# Altium PCB Morpheus_pill.PcbDoc
Units mil, origin at the board's own origin, x right, y up, seen from the top; angles counter-clockwise.
Board outline 809.88 x 810.01 mil, 4 copper layers (TOP, VSS, SIG, BOT), stack 31.6 mil thick; 82 components, 62 nets, 246 pads, 116 vias.
Unrouted connection lines stored in the file: 3.
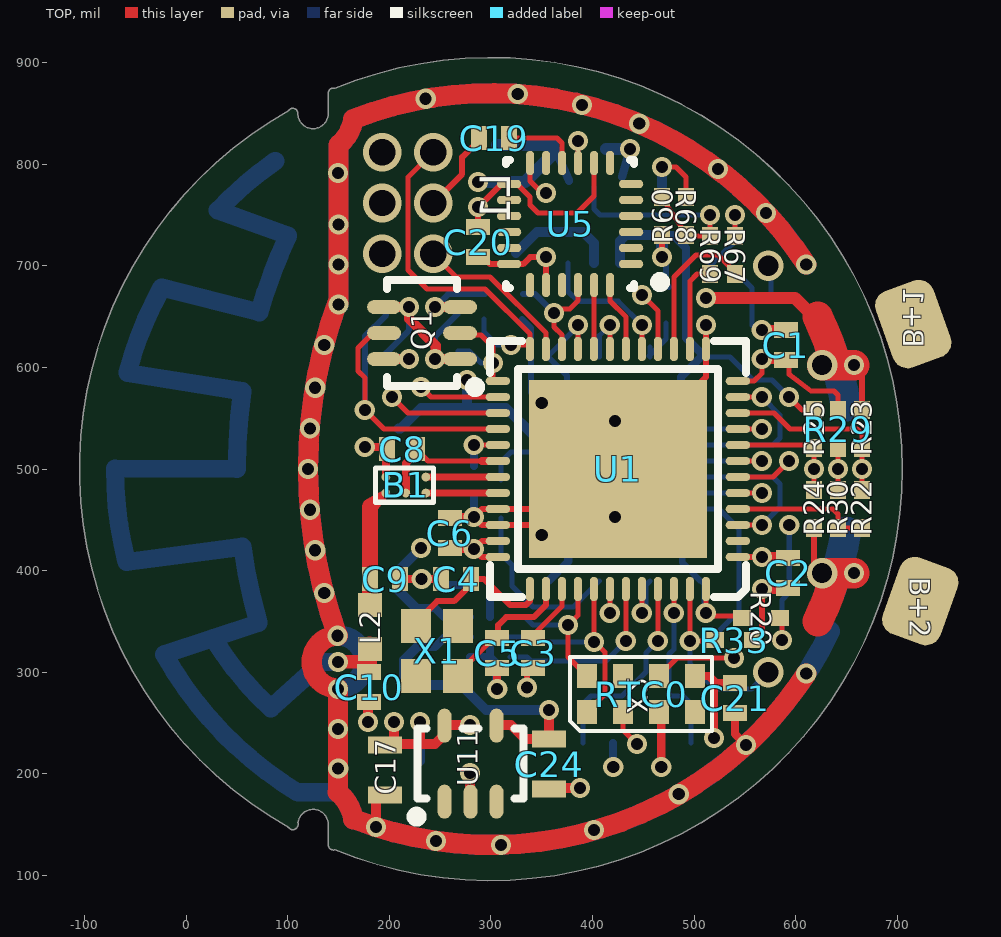
[diagram p0: TOP view]
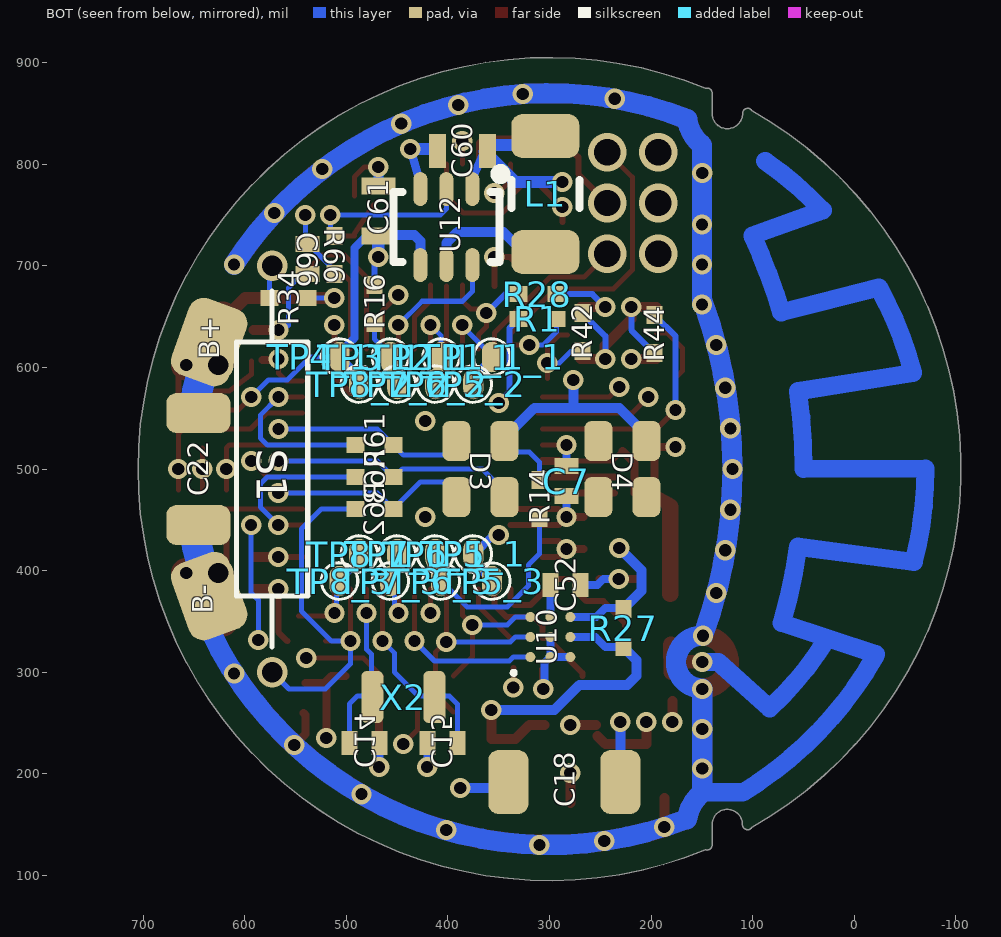
[diagram p1: BOT view, seen from below]
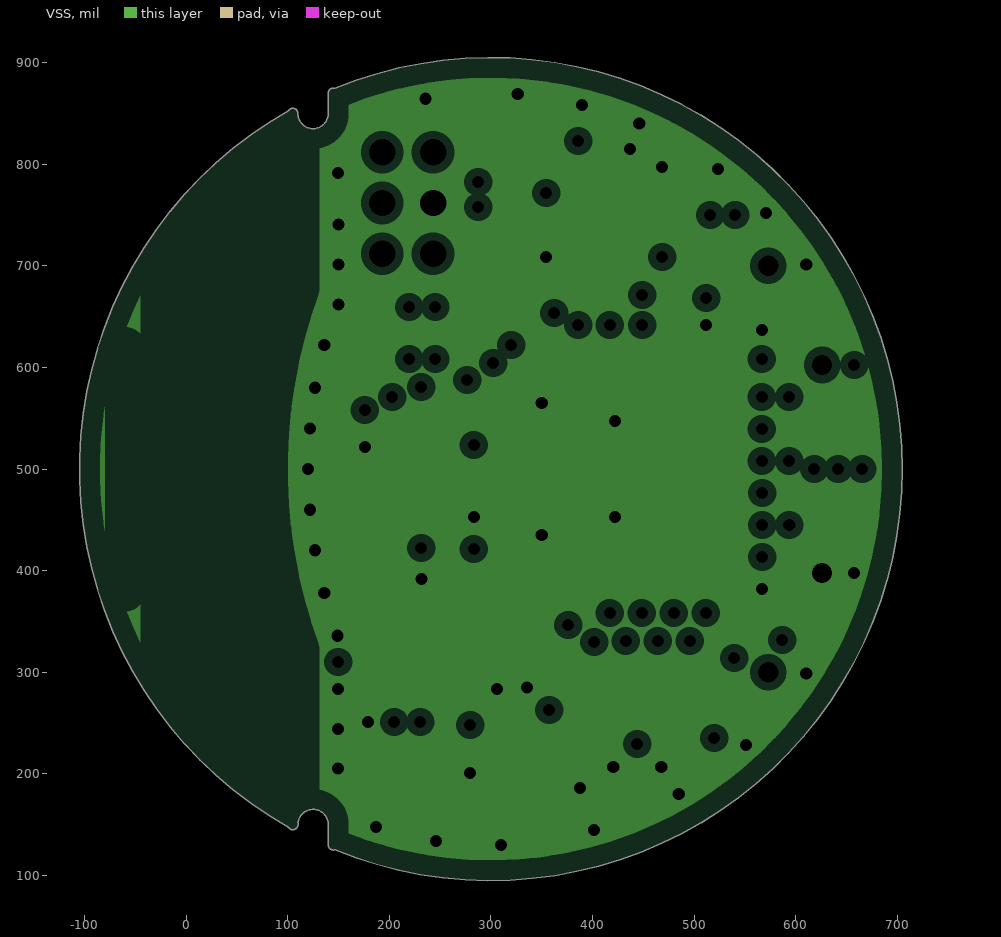
[diagram p2: VSS, clearances drawn from the general rule]
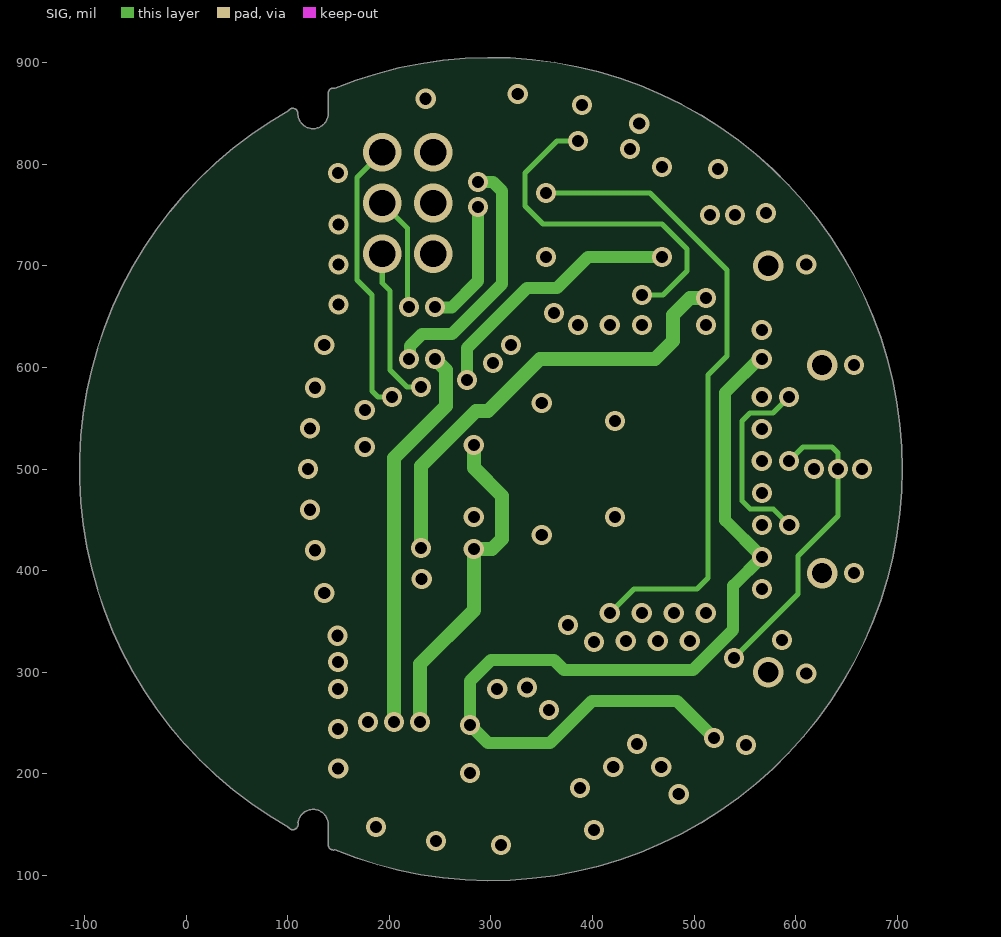
[diagram p3: SIG]

## Layer stack, top to bottom
TOP: signal copper 1.4
Dielectric: prepreg 6, FR-4, Dk 4.8
VSS: plane copper 1.4, net GND
Dielectric: core 14, FR-4, Dk 4.8
SIG: signal copper 1.4
Dielectric: prepreg 6, FR-4, Dk 4.8
BOT: signal copper 1.4

## Board outline
100.7,147.41 cw(c300,500) 100.7,852.59 cw(c105,850) 110.02,850 ccw(c125,850) 139.99,850 139.99,870 cw(c145,870) 146.48,874.79 cw(c300,500) 705.01,500 cw(c300,500) 146.48,125.21 cw(c145,130) 139.99,130 139.99,150 ccw(c125,150) 110.14,151.95 cw(c105.32,150.57) 110.33,150.57 cw(c105.32,150.57) 109.53,147.85 cw(c105,150)

## Design rules (kind name [scope] priority, off if disabled: settings)
Clearance "Top Polygon" [(InPolygon)] p1: gap=5
Clearance [All] p2: gap=3
ComponentClearance [All] p1: gap=5 collisioncheckmode=3 verticalgap=5 showdistances=FALSE
FabricationTestPointUsage TestPointUsage [All] p1: valid=0 allowmultiple=FALSE
FabricationTestpoint Testpoint [All] p1: side=3 testpointundercomponent=TRUE minsize=40 maxsize=100 preferedsize=60 minholesize=0 maxholesize=40 preferedholesize=32 testpointgrid=1 allowsidetop=TRUE allowsidebottom=TRUE usegrid=TRUE gridtolerance=0.01
HoleSize [All] p1: absolutevalues=TRUE maxlimit=250 minlimit=3 maxpercent=80.000 minpercent=20.000
MinimumAnnularRing [All] p1: minimumring=2
PasteMaskExpansion [All] p1: expansion=-1
PlaneClearance [All] p1: clearance=8
PlaneConnect [All] p1: planeconnectstyle=Direct reliefexpansion=25 reliefentries=4 reliefconductorwidth=20 reliefairgap=10
PolygonConnect [All] p1: connectstyle=Direct reliefconductorwidth=15 reliefentries=4 polygonreliefangle="45 Angle"
RoutingLayers [All] p1: top layer_v5=TRUE mid layer 2_v5=FALSE bottom layer_v5=TRUE
RoutingVias [All] p1: holewidth=12 width=22 viastyle="Through Hole" minholewidth=3 minwidth=8 maxholewidth=65 maxwidth=100
SilkscreenOverComponentPads [All] p1: minsilkscreentomaskgap=10
SolderMaskExpansion [All] p1: expansion=3
Width [All] p1: maxlimit=200 minlimit=3 preferedwidth=10 toplayer_maxwidth=100 midlayer2_maxwidth=100 minimp=50.000000 maximp=50.000000 favimp=50.000000
19 further rules are at their usual default settings.

## Classes and differential pairs
component class Morpheus_pill: C9 C10 R29 R30
component class Bluetooth: B1 C1 C2 C3 C4 C5 C6 C7 C8 C14 C15 R33 R34 RTC0 U1 X1 X2
component class Memory: R14 R16
component class Motion: C19 C20 R28 U5
component class Power: B+ B- C17 C18 C22 C24 C52 C60 C61 C66 D3 Q1 R42 R44 R60 R61 R62 R63 R66 R67 R68 R69 U10 U11 U12

## Components (designator, comment, footprint, x,y, rotation, side; value= is the part's Value field where it differs from the comment)
B1 "BAL-NRF02D3" BAL-ST-WLCSP 216.34,484.25 r180 top locked
B+ "5016" TP0875x050#1 722.44,626.97 r180 bottom
B+1 "5016" TP0875x050#2 803.15,644.68 r180 top (schematic designator B+)
B+2 "5016" TP0875x050#1 810.04,368.11 r180 top (schematic designator B+)
B- "5016" TP0875x050#3 647.64,382.87 r90 bottom
C1 "0.1u" CAP0402 590.35,622.05 r270 top
C2 "0.1u" CAP0402 592.52,397.64 r90 top
C3 "0.1u" CAP0402 341.54,318.9 r90 top
C4 "12p" CAP0402 265.75,391.73 r0 top
C5 "12p" CAP0402 306.14,318.9 r90 top
C6 "1000p" CAP0402 259.65,437.01 r270 top
C7 "0.047u" CAP0402 283.46,488.19 r90 bottom
C8 "2200p" CAP0402 212.6,519.68 r0 top
C9 "2.2 p" CAP0402 195.87,391.73 r0 top
C10 "1.0p" CAP0402 180.08,285.36 r270 top
C14 "12p" CAP0402 482.28,230.32 r0 bottom
C15 "12p" CAP0402 405.51,230.32 r180 bottom
C17 "4.7u" CAP0603 195.87,203.74 r90 top
C18 "100u" CAP1206 285.43,191.93 r180 bottom
C19 "0.1u" CAP0402 303.15,825.79 r0 top
C20 "0.1u" CAP0402 287.4,723.43 r90 top
C21 "0.1u" CAP0402 540.35,274.61 r90 top
C22 "100u" CAP1206 645.67,500 r270 bottom locked
C24 "4.7u" CAP0603 357.28,209.65 r90 top
C52 "0.47u" CAP0402 284.45,385.83 r180 bottom
C60 "4.7u" CAP0603 385.83,812.99 r180 bottom
C61 "4.7u" CAP0603 468.5,753.94 r270 bottom
C66 "1000p" CAP0402 538.39,706.69 r90 bottom
D3 "LTST-C19F" DFN165X210X160X80-4N 368,500 r180 bottom
D4 "LTST-C19F" DFN165X210X160X80-4N 228.35,500 r180 bottom (schematic designator D3)
L1 "2.2u" IND_1206 304.13,770.67 r270 bottom locked
L2 "2.2n" IND_0402 181.1,344.49 r270 top
Q1 "Si1965EH" SOT65P212X110-6N 232.28,633.86 r180 top locked
R1 "100k" RES0402 312.01,647.64 r0 bottom
R14 "100k" RES0402 310.04,470.47 r90 bottom
R16 "100k" RES0402 472.44,662.4 r90 bottom
R20 "100K" RES0402 565.94,353.35 r0 top
R22 "1.3M" RES0402 665.35,460.63 r90 top
R23 "1.3M" RES0402 665.35,539.37 r90 top
R24 "1.3M" RES0402 618.11,460.63 r90 top
R25 "1.3M" RES0402 618.11,539.37 r90 top
R27 "100" RES0402 227.36,343.5 r90 bottom
R28 "100k" RES0402 312.01,672.24 r180 bottom
R29 "1.3M" RES0402 641.73,539.37 r90 top
R30 "1.3M" RES0402 641.73,460.63 r90 top
R33 "1.3M" RES0402 539.37,331.69 r180 top
R34 "1.3M" RES0402 557.09,668.31 r180 bottom
R42 "1.3M" RES0402 267.72,634.84 r90 bottom
R44 "1.3M" RES0402 196.85,632.87 r270 bottom
R60 "1.3M" RES0402 468.5,749.02 r270 top
R61 "100" RES0402 472.44,523.62 r180 bottom
R62 "100" RES0402 472.44,460.63 r180 bottom
R63 "100" RES0402 472.44,492.13 r180 bottom
R66 "523k" RES0402 511.81,710.63 r90 bottom
R67 "100k" RES0402 540.35,710.63 r90 top
R68 "523k" RES0402 492.13,749.02 r270 top
R69 "523k" RES0402 515.75,710.63 r90 top
RTC0 "AB-RTCMC-32.768kHz-AIGZ" 8-CLCC 447.83,278.54 r0 top locked
S1 "REED_SPST_NO" REED-10x1.8 573,500 r270 bottom
TP1_1_1 "" TP30 356.69,610.24 r90 bottom
TP2_1_1 "" TP30 406.69,610.24 r90 bottom
TP3_1_1 "" TP30 456.69,610.24 r90 bottom
TP4_1_1 "" TP30 506.69,610.24 r90 bottom
TP5_1 "" TP30 375,416.34 r90 bottom
TP5_2 "" TP30 375,583.66 r90 bottom
TP5_3 "" TP30 356.69,389.76 r90 bottom
TP6_1 "" TP30 412.4,416.34 r90 bottom
TP6_2 "" TP30 412.4,583.66 r90 bottom
TP6_3 "" TP30 406.69,389.76 r90 bottom
TP7_1 "" TP30 449.8,416.34 r90 bottom
TP7_2 "" TP30 449.8,583.66 r90 bottom
TP7_3 "" TP30 456.69,389.76 r90 bottom
TP8_1 "" TP30 487.2,416.34 r90 bottom
TP8_2 "" TP30 487.2,583.66 r90 bottom
TP8_3 "" TP30 506.69,389.76 r90 bottom
U1 "nRF51822-QF" VQFN40P600X600X100-48 425,500 r180 top locked
U5 "InvenSense MPU-6500" QFN-24 377.95,741.14 r180 top locked
U10 "BQ27421YZFT-G1A" BGA9C50P3X3_158X162X62 299.21,334.65 r90 bottom
U11 "TPS79718" SOT65P212X110-5N 280,210 r90 top locked
U12 "TPS61220" SOT65P212X110-6N 401.57,738.19 r270 bottom locked
X1 "ILCX19" ILCX19 211.65,362.2 r270 top
X2 "ABS06-32.768kHz" ABS06 443.9,275.59 r180 bottom locked

## Footprints (in the part's own frame and the unit in brackets; to place one, negate y for a bottom-side part, rotate by r counter-clockwise, add the part's x,y. Pads: shape width x height; smd on the part's side, far side on the other; paste and mask are expansions set on the pad)
8-CLCC [mm] "8 lead CLCC package, 2.3 x 1.5mm"
  rect 0.5x0.6 smd: 1(-1.35,-0.45) 2(-0.45,-0.45) 3(0.45,-0.45) 4(1.35,-0.45) 5(1.35,0.45) 6(0.45,0.45) 7(-0.45,0.45) 8(-1.35,0.45)
  silkscreen extent -1.78,-0.92 1.78,0.92, body extent -1.6,-0.75 1.6,0.75, height 0.8
ABS06 [mm] "Abracon ABS06 32.768KHz XO 1.2x2.0x0.6mm"
  rrect50% 0.55x1.3 smd: 1(-0.775,0) 2(0.775,0)
  body extent -1,-0.6 1,0.6, height 0.6
BAL-ST-WLCSP [mm]
  round 0.22 smd mask+0.05: A1(0.5,0.2) A2(0,0.2) A3(-0.5,0.2) B1(0.5,-0.2) B3(-0.5,-0.2)
  TOP pour cut-out: -0.697,-0.43 0.756,-0.43 0.756,0.44 -0.697,0.44
  silkscreen extent -0.69,-0.43 0.76,0.43, body extent -0.7,-0.43 0.76,0.43, height 0.63
BGA9C50P3X3_158X162X62 [mm] "BGA, 9-Leads, Body 1.58x1.62mmx0.63mm, Pitch 0.50mm"
  round 0.25 smd: A1(-0.5,0.5) A2(0,0.5) A3(0.5,0.5) B1(-0.5,0) B2(0,0) B3(0.5,0) C1(-0.5,-0.5) C2(0,-0.5) C3(0.5,-0.5)
  silkscreen extent -0.94,0.87 -0.85,0.96, body extent -0.79,-0.81 0.79,0.81, height 0.63
CAP0402 [mm] "Chip Capacitor, 2-Leads, Body 0402 / 0.10x0.50mm, IPC High Density"
  rect 0.4x0.6 smd: 1(-0.375,0) 2(0.375,0)
  body extent -0.53,-0.28 0.53,0.28, height 0.55
CAP0603 [mm] "Chip Capacitor, 2-Leads, Body 0603 / 1.60x0.8mm, IPC High Density"
  rect 0.425x0.85 smd: 1(-0.625,0) 2(0.625,0)
  body extent -0.8,-0.4 0.8,0.4, height 0.8
CAP1206 [mm] "Chip Capacitor, 2-Leads, Body 1206 / 3.20x1.60mm, IPC High Density"
  rrect50% 1x1.6 smd: 1(-1.4,0) 2(1.4,0)
  body extent -1.63,-0.8 1.65,0.8, height 1.6
DFN165X210X160X80-4N [mm] "DFN, 4-Leads, body 0.210x0.160mm (max), Pitch 1.65x0.95mm"
  rrect50% 0.7x1 smd: 1(-0.6,0.7) 2(-0.6,-0.7) 3(0.6,-0.7) 4(0.6,0.7)
  body extent -0.95,-1.2 0.95,1.2, height 2
ILCX19 [mm] "ILSI ILCX19 Crystal Oscillator 2.0 x 1.6 x 0.45mm"
  rect 0.85x0.75 smd: 1(0.425,0.375) 2(1.675,0.375) 3(1.675,1.425) 4(0.425,1.425)
  body extent 0.05,0.1 2.05,1.7, height 0.45
IND_0402 [mm] "Chip Inductor, 2-Leads, Body 1.00x0.50mm, IPC Medium Density"
  rect 0.6x0.6 smd: 1(-0.55,0) 2(0.55,0)
  body extent -0.52,-0.28 0.53,0.27, height 0.55
IND_1206 [mm] "Chip Inductor, 2-Leads, Body 3.20x1.60mm, IPC Medium Density"
  rrect50% 1.1x1.7 smd: 1(-1.45,0) 2(1.45,0)
  silkscreen extent -0.35,-0.85 0.35,0.85, body extent -0.8,-0.4 0.8,0.4, height 0.8
QFN-24 [mil]
  oval 24x8 smd: 1(-60.04,39.37) 2(-60.04,23.62) 3(-60.04,7.87) 4(-60.04,-7.87) 5(-60.04,-23.62) 6(-60.04,-39.37) 13(60.04,-39.37) 14(60.04,-23.62) 15(60.04,-7.87) 16(60.04,7.87) 17(60.04,23.62) 18(60.04,39.37)
  oval 8x24 smd: 7(-39.37,-60.04) 8(-23.62,-60.04) 9(-7.87,-60.04) 10(7.87,-60.04) 11(23.62,-60.04) 12(39.37,-60.04) 19(39.37,60.04) 20(23.62,60.04) 21(7.87,60.04) 22(-7.87,60.04) 23(-23.62,60.04) 24(-39.37,60.04)
  TOP pour cut-out: -53.15,53.15 -53.15,-53.15 53.15,-53.15 53.15,53.15
  silkscreen extent -94,-63 63,63, body extent -57,-57 57,57, height 37
REED-10x1.8 [mil]
  round 30 hole 20: 1(-200,0) 2(200,0)
  silkscreen extent -175,-35 175,35
RES0402 [mm] "Chip resistor 0402 high density"
  rect 0.45x0.4 smd: 1(-0.475,0) 2(0.475,0)
  body extent -0.61,-0.2 0.6,0.2, height 0.5
SOT65P212X110-5N [mm] "SOT23, 5-Leads, Body 2.3x2.3mm (max), Pitch 0.65mm, IPC Medium Density"
  oval 0.85x0.35 smd: 1(-0.95,0.65) 2(-0.95,0) 3(-0.95,-0.65) 4(0.95,-0.65) 5(0.95,0.65)
  silkscreen extent -1.45,-1.33 0.88,1.47, body extent -0.67,-1.12 0.67,1.13, height 1.1
SOT65P212X110-6N [mm] "SOT23, 6-Leads, Body 2.3x2.3mm (max), Pitch 0.65mm, IPC Medium Density"
  oval 0.85x0.35 smd: 1(-0.95,0.65) 2(-0.95,0) 3(-0.95,-0.65) 4(0.95,-0.65) 5(0.95,0) 6(0.95,0.65)
  silkscreen extent -1.45,-1.33 0.87,1.47, body extent -0.67,-1.12 0.67,1.13, height 1.1
TP30 [mil] "Test Point, 30mils"
  oval 30x20 smd paste-15: 1(0,0)
  silkscreen extent -18,-18 18,18
TP0875x050#1 [mil] "Test Pad 0.875x0.50mm"
  rrect50% 60x80 smd rot 160: 1(87.44,-1.97)
TP0875x050#2 [mil] "Test Pad 0.875x0.50mm"
  rrect50% 60x80 smd rot 20: 1(87.44,1.97)
TP0875x050#3 [mil] "Test Pad 0.875x0.50mm"
  rrect50% 60x80 smd rot 110: 1(-7.87,-12.64)
VQFN40P600X600X100-48 [mil]
  rect 175x175 smd: 0(0,0)
  oval 24x8 smd: 1(-118.11,86.61) 2(-118.11,70.87) 3(-118.11,55.12) 4(-118.11,39.37) 5(-118.11,23.62) 6(-118.11,7.87) 7(-118.11,-7.87) 8(-118.11,-23.62) 9(-118.11,-39.37) 10(-118.11,-55.12) 11(-118.11,-70.87) 12(-118.11,-86.61) 25(118.11,-86.61) 26(118.11,-70.87) 27(118.11,-55.12) 28(118.11,-39.37) 29(118.11,-23.62) 30(118.11,-7.87) 31(118.11,7.87) 32(118.11,23.62) 33(118.11,39.37) 34(118.11,55.12) 35(118.11,70.87) 36(118.11,86.61)
  oval 8x24 smd: 13(-86.61,-118.11) 14(-70.87,-118.11) 15(-55.12,-118.11) 16(-39.37,-118.11) 17(-23.62,-118.11) 18(-7.87,-118.11) 19(7.87,-118.11) 20(23.62,-118.11) 21(39.37,-118.11) 22(55.12,-118.11) 23(70.87,-118.11) 24(86.61,-118.11) 37(86.61,118.11) 38(70.87,118.11) 39(55.12,118.11) 40(39.37,118.11) 41(23.62,118.11) 42(7.87,118.11) 43(-7.87,118.11) 44(-23.62,118.11) 45(-39.37,118.11) 46(-55.12,118.11) 47(-70.87,118.11) 48(-86.61,118.11)
  silkscreen extent -126,-126 126,126

## Part data
B1: library part BAL-ST-5pin_DC-Flip, "50 ohm balun transformer for 2.45GHz ISM"
B+ B+1 B+2 B-: "Single-pad test point"
C1 C2 C3 C19 C20 C21: library part C_0.1u_10_50_X7R_0402, "Chip capacitor"
C4 C5 C14 C15: library part C_27p_5_50_C0G_0402, "Chip capacitor"
C6 C66: library part C_1000p_10_50_X7R_0402, "Chip capacitor"
C7: library part C_0.047u_10_16_X7R_0402, "Chip capacitor"
C8 C10: library part C_2200p_5_16_STD_0402, "Chip capacitor"
C9: library part C_2.2p_0.05_50_C0G_0402, "Chip capacitor"
C17 C24: library part C_4.7u_10_10_JB_0402, "Chip capacitor"
C18 C22: library part C_100u_20_6.3_X5R_1206, "Chip capacitor"
C52: library part C_0.47u_10_10_X5R_0402, "Chip capacitor"
C60 C61: library part C_4.7u_20_6.3_X5R_0603, "Chip capacitor"
D3 D4: "RGB LED Array"
L1: library part L_2.2u_1206, "SMD power inductor, 2.2uH"
L2: library part L_2.2n_0.1_?_0.150_0.9_?, "SMD power inductor, 2.2uH"
Q1: "Vishay Dual P-Channel MOSFET 1.8v drive 20V 1A"
R1 R67: library part R_100k_1_0.1_0402, "Chip Resistor"
R14 R16 R20 R28: library part R_100K_5_0.1_0402, "Chip Resistor"
R22 R23 R24 R25 R29 R30 R33 R34 R42 R44 R60: library part R_1.3M_5_0.1_0402_1, "Chip Resistor"
R27 R61 R62 R63: library part R_100_1_0.1_0402, "Chip Resistor"
R66 R68 R69: library part R_523k_1_0.1_0402, "Chip Resistor"
RTC0: "Abracon I2C RTC w/ integrated XO"
S1: library part SW_REED_SPST_NO, "SWITCH REED SPST NO"
U1: library part nRF51822_QF, "Multi-protocol Bluetooth Low Energy and 2.4GHz proprietary system-on-chip"
U5: library part MPU-6500, "InvenSense MPU-6500 6-axis accelerometer and gyroscope"
U10: library part BQ27421, "TI Fuel Gauge With Integrated Sense Resistor"
U11: library part TPS79718DCK, "LDO 1.8V SC70-5"
U12: "Boost Converter"
X1: "ILSI ILCX19 Crystal Oscillator"
X2: library part ABS06, "Abracon ABS06 32.768kHz XO 2.0x1.2x0.6mm"

## Via types
v1: diameter 20, hole 12, TOP to BOT, 107 vias
v2: diameter 38, hole 26, TOP to BOT, 6 vias
v3: diameter 30, hole 20, TOP to BOT, 2 vias
v4: diameter 20, hole 12, TOP to BOT, tented both sides, 1 vias

## Nets (pads, with @x,y where several pads share a name; then routed paths per layer and width w, separated by ;. In a path a pad name is that pad's centre, name@x,y a point inside that pad or via, vN(x,y) a via of type N, cw(c..) or ccw(c..) an arc to the next point about the centre after c; other vN are vias at no path point)
AIN0: C15.2 U1.45 X2.2 | length 198
  TOP w5: v1(464.37,330.71) U1.45
  BOT w5: C15.2 390.75,268.7 398.62,276.57 X2.2@412.4,276.57 ; X2.2@414.37,276.57 429.13,276.57 452.76,300.2 452.76,319.09 v1(464.37,330.71)
AIN1: C14.2 U1.46 X2.1 | length 170.9
  TOP w5: U1.46 v1(480.12,358.27) v1@480.37,358.02
  BOT w5: v1(480.12,358.27) 480.12,322.64 475.39,317.91 475.39,276.57 489.17,276.57 497.05,268.7 C14.2
AIN2: D3.2 R62.2 U1.5 | length 215.7
  TOP w5: U1.5 v1(566.93,476.38)
  BOT w5: D3.2@393.21,488.68 394.69,487.2 427.17,487.2 R62.2 469.49,476.38 v1(566.93,476.38)
AIN3: R29.1 R30.2 RTC0.6 U1.6 | length 480
  TOP w5: RTC0.6 483.27,313.98 v1(539.37,313.98) ; U1.6 577.76,492.13 v1(593.5,507.87) ; R30.2 R29.1
  SIG w5: v1(539.37,313.98) 602.36,376.97 602.36,414.37 641.73,453.74 v1(641.73,500) 641.73,515.75 635.83,521.65 607.28,521.65 v1(593.5,507.87)
AIN4: D3.3 R63.2 U1.7 | length 270.3
  TOP w5: U1.7 v1(566.73,507.87)
  BOT w5: D3.3 344.38,478.24 366.14,500 444.88,500 R63.2@453.25,491.63 ; R63.2 469.49,507.87 v1(566.73,507.87)
AIN5: R24.2 R25.1 U1.8 | length 117.6
  TOP w5: U1.8 615.16,523.62 R25.1 R24.2
  other v1: 618.11,500
AIN6: D3.1 R61.2 U1.9 | length 205.8
  TOP w5: U1.9 v1(566.73,539.37)
  BOT w5: D3.1 D3.1@391.62,529.42 ; D3.1@397.64,515.26 399.11,513.78 443.9,513.78 R61.2 469.49,539.37 v1(566.73,539.37)
AIN7: R22.2 R23.1 U1.10 | length 185.9
  TOP w5: U1.10 578.54,555.12 594.29,539.37 660.43,539.37 665.35,534.45 R23.1 R22.2
  other v1: 665.35,500
ANT1: B1.B3 U1.31 | length 63
  TOP w7: B1.B3 U1.31@299.02,492.13
ANT2: B1.A3 U1.32 | length 63
  TOP w7: B1.A3 U1.32@299.02,476.38
AUX_SCL: U5.7
AUX_SDA: U5.21
BLE_ANT: C10.1 L2.2 | length 1571.6
  TOP w14: v1(149.61,310.04) 178.14,310.65
  TOP w16: C10.1 L2.2@180.42,326.97
  BOT w18: -58.69,408.58 55.35,423.45 ccw(c600,500) 71.31,348.4 -21.21,317.56 ; -58.54,408.62 cw(c300,500) -70,500.62 50,500 cw(c600,500) 55.35,576.55 -57.74,594.46 cw(c300,500) -24.01,678.66 71.96,654.18 ; -21.35,317.48 ccw(c301.46,498.29) 110.15,181.59 ; 26.81,333.36 ccw(c300,500) 83.5,264.36 ; 31.05,754.67 100.3,729.8 ; 31.33,754.4 cw(c300,500) 87.78,803.09 ; 72.05,654.16 cw(c600,500) 100.26,729.7 ; 83.3,264.58 133.86,309.98 v1(149.61,310.04) ; 110.15,181.74 149.34,181.74
BLE_OUT: B1.A1 C9.1 L2.1 | length 120.8
  TOP w8: 181.47,467.94 B1.A1 185.83,462.6
  TOP w16: L2.1@181.1,376.97 181.1,462.83
CLK: RTC0.2 | length 37.2
  TOP w5: RTC0.2 430.12,243.11 v1(443.9,229.33)
DCC: U1.2
DEC1: C3.2 U1.39 | length 63.3
  TOP w5: C3.2@337.15,332.15 369.88,364.88 U1.39
FA: C66.2 R66.1 R67.2 | length 83.4
  TOP w5: R67.2 v1(540.35,750)
  BOT w5: R66.1@514.76,698.82 C66.2@538.39,722.44 ; C66.2@536.42,723.43 537.89,721.95 C66.2 ; C66.2@540.35,723.43 v1(540.35,750)
FB: R60.1 R66.2 R68.2 R69.2 U12.2 | length 237.7
  TOP w5: R60.1@472.44,760.83 R68.2@492.13,731.3 ; R68.2@492.13,729.33 R69.2 v1(515.75,750) v1@515.75,753.94
  BOT w5: U12.2@401.58,777.56 401.58,755.9 407.48,750 v1(515.75,750) R66.2@515.75,734.25
FLASH_MISO: TP7_1.1 TP7_3.1 U1.44 | length 58.5
  TOP w5: v1(448.62,358.27) U1.44
  BOT w5: v1(448.62,358.27) 452.76,362.4 452.76,385.83 TP7_3.1
FLASH_MOSI: TP1_1_1.1 TP5_2.1 U1.21 | length 101.3
  TOP w5: U1.21 v1@385.63,641.73
  BOT w5: TP1_1_1.1 356.69,611.61 385.83,640.75 v1(385.83,641.73)
  BOT w6: TP1_1_1.1 375,591.93 TP5_2.1
FLASH_SCLK: TP2_1_1.1 TP6_2.1 U1.19 | length 59.4
  TOP w5: U1.19 v1(417.13,641.73)
  BOT w5: TP2_1_1.1 406.69,631.3 v1(417.13,641.73)
FRST: R16.1 TP3_1_1.1 TP7_2.1 | length 49.3
  BOT w5: TP3_1_1.1@455.71,611.22 472.44,627.95 R16.1 ; TP3_1_1.1 TP3_1_1.1@456.69,620.08
FS: L1.2 U12.5 | length 109.5
  BOT w10: L1.2@324.8,712.6 345.47,733.27 390.75,733.27 401.57,722.44 U12.5@401.57,702.76
FSYNC: U5.11
FWPT: R14.1 TP6_1.1 TP6_3.1 | length 176.4
  BOT w5: R14.1 310.04,416.34 320.87,405.51 320.87,384.84 341.54,364.17 381.1,364.17 TP6_3.1
GND: B1.B1 B+2.1 B-.1 C1.1 C2.1 C3.1 C4.1 C5.1 C6.1 C7.1 C8.1 C9.2 C10.2 C14.1 C15.1 C17.1 C18.1 C19.1 C20.1 C21.1 C22.2 C24.1 C52.2 C60.1 C61.1 C66.1 R1.2 R24.1 R33.1 R68.1 RTC0.3 TP5_1.1 TP5_3.1 U1.0 U1.13 U1.33 U1.34 U5.18 U5.20 U10.B1 U10.B2 U10.C1 U11.2 U12.3 | length 5108.7
  TOP w5: v1(468.5,797.24) 482.28,797.24 492.13,787.4 R68.1@492.13,768.7
  TOP w6: v2(243.11,761.81) 271.65,790.35 271.65,807.09 C19.1@290.35,825.79 ; C20.1@287.4,713.58 299.21,701.77 U5.18 331.69,701.77 338.58,708.66 v1(354.33,708.66) U5.20@354.33,680.12 ; v1(335.63,284.96) C3.1@335.63,304.13 ; U1.0@338.39,444.88 U1.34 291.14,444.88 v1(283.27,452.76) 291.14,460.63 U1.33 U1.0@338.39,460.63 ; U1.0@496.18,575 511.61,590.43 U1.13 ; U1.13@511.81,618.11 v1(511.81,641.73) ; R33.1@558.07,330.71 566.93,339.57 v1(566.93,381.89) ; v3@618.11,405.51 R24.1
  TOP w7.87: C6.1@266.54,452.76 v1(283.27,452.76)
  TOP w8: v1(175.98,521.65) C8.1@196.65,521.65 ; B1.B1 C8.1@196.65,523.62 ; C9.2 C4.1 ; v1(306.14,283.46) C5.1@306.14,302.64 ; v1(467.72,206.69) RTC0.3@467.72,260.83 ; C21.1@542.32,259.84 540.35,257.87 540.35,239.17 v1(551.18,228.35)
  TOP w10: v1(179.13,250.98) C10.2@179.13,271.65 ; v1(187.01,147.64) C17.1@187.01,176.18 ; U11.2@279.53,171.26 v1(279.53,200.79) ; C24.1@357.28,186.02 v1(387.8,186.02) ; v1(566.73,636.81) C1.1 C1.1@591.34,636.81 ; v1(566.93,381.89) C2.1@590.55,381.89
  TOP w20: v1(148.95,335.83) cw(c600,500) v1@148.95,664.17 ; 149.34,181.74 cw(c125,150) 164.64,155.39 ; 149.61,182.09 v1(149.61,283.46) ; v1@149.61,284.04 cw(c149.61,310.04) v1@149.61,336.04 ; v1@150,664.17 150,818.9 ; 150.06,818.82 ccw(c125,850) 164.53,843.91 ; 164.4,844.26 cw(c300,500) v1(610.48,701.25) ; 164.73,155.62 ccw(c300,500) v1(551.18,228.35) ccw(c300,500) v1(610.48,298.75)
  TOP w30: 621.74,349.97 ccw(c300,500) v3@637.63,390.3 ; v3(625.98,397.64) v1(657.48,397.64)
  BOT w5: C66.1@543.31,691.93 557.09,678.15 557.09,641.53 v1@566.73,631.89
  BOT w6: R1.2 339.57,638.78 339.57,575.43 v1(350,565)
  BOT w7.87: v1(231.81,391.73) 247.05,391.73 252.95,385.83 C52.2 ; U10.C1 U10.B1 ; U10.B2 U10.B1 ; v1(306.14,283.46) 305.12,284.49 305.12,309.06 U10.B1
  BOT w8: v1@283.46,452.76 C7.1 ; v1(350,435) 355.35,435 374.02,416.34 TP5_1.1 ; TP5_3.1 376.18,409.25 TP5_1.1@376.18,416.34 ; v1@420.28,206.69 C15.1 ; U12.3@429.13,787.4 v1(437.01,814.96) ; v1@467.52,206.69 C14.1
  BOT w10: C18.1@353.35,186.02 v1(387.8,186.02) ; C61.1 v1(468.5,797.24)
  BOT w12: C60.1@413.39,814.96 v1(437.01,814.96)
  BOT w20: v1(148.95,335.83) cw(c600,500) v1@148.95,664.17 ; 149.34,181.74 cw(c125,150) 164.64,155.39 ; 149.61,181.74 v1(149.61,283.46) ; v1@149.61,284.04 ccw(c149.61,310.04) v1@149.61,336.04 ; v1(150,662.01) 150,818.82 ; 150.06,818.82 ccw(c125,850) 164.53,843.91 ; 164.4,844.26 cw(c300,500) v1@610.62,701.04 ; 164.72,155.62 ccw(c300,500) B-.1@633.84,340.47
  BOT w30: B-.1@633.59,378.58 ccw(c300,500) C22.2@649.61,438.35
  other v1: 310,130 246.06,133.86 401.57,144.68 485,180 149.65,205.32 420.47,206.69 149.61,244.09 136,378 127,420 422.24,452.76 122,460 120,500 122,540 422.24,547.24 127,580 136,622 150,701.38 150,740.75 570.87,751.97 149.61,791.34 523.62,795.28 446.03,839.96 389.76,858.27 235.75,864.38 326.36,869.06
IMU_EN: Q1.5 R44.1 U1.28 | length 336.1
  TOP w5: 194.69,539.37 v1(175.98,558.07) 175.98,589.76 169.29,596.46 169.29,619.09 184.06,633.86 Q1.5 ; 194.88,539.37 U1.28
  BOT w6: v1(175.98,558.07) 175.98,630.71 R44.1
IMU_MISO: U1.16 U5.9 | length 432.6
  TOP w5: U5.9@385.83,800.2 v4(385.83,822.83) ; v1(448.82,671.26) 464.37,655.71 U1.16
  SIG w5: v4(385.83,822.83) 365.16,822.83 333.66,791.34 333.66,758.86 351.38,741.14 468.5,741.14 493.11,716.54 493.11,694.88 469.49,671.26 v1(448.82,671.26)
IMU_MOSI: U1.18 U5.24 | length 69.4
  TOP w5: U5.24 417.32,665.35 432.87,649.8 U1.18
IMU_SCLK: U1.20 U5.23 | length 62
  TOP w5: U1.20 401.38,641.73 U5.23@401.38,680.12
LED1: R61.1 U1.11 | length 167.8
  TOP w5: U1.11 v1(566.73,570.87)
  BOT w5: R61.1 577.76,523.62 584.65,530.51 584.65,552.95 v1(566.73,570.87)
LED2: R33.2 R62.1 S1.2 U1.47 | length 395.4
  TOP w5: U1.47 v1(495.87,330.71) R33.2@520.67,330.71
  BOT w5: R62.1 524.61,460.63 544.29,440.94 544.29,360.24 514.76,330.71 v1(495.87,330.71) 495.87,308.27 520.67,283.46 556.46,283.46 S1.2
LED3: R63.1 U1.3 | length 167.9
  TOP w5: U1.3 v1(566.93,444.88)
  BOT w5: R63.1 577.76,492.13 584.65,485.24 584.65,462.6 v1(566.93,444.88)
LED_EN: Q1.2 R42.1 U1.25 | length 94.6
  TOP w5: Q1.2@282.48,631.89 290.35,631.89 302.17,620.08 v1(302.17,604.33) U1.25@302.17,589.37
  BOT w5: R42.1 278.54,616.14 290.35,604.33 v1(302.17,604.33)
NetC19_2: C19.2 U5.10 | length 71.9
  TOP w5: C19.2@319.88,825.79 365.16,825.79 370.08,820.87 U5.10
NFLASH_CS: R20.1 TP8_1.1 TP8_3.1 U1.48 | length 128.2
  TOP w5: U1.48 v1(511.61,358.27) 514.57,355.32 R20.1@547.24,355.32
  BOT w5: TP8_3.1 509.84,386.61 509.84,360.04 v1(511.61,358.27)
  BOT w6: TP8_1.1@488.39,416.34 488.39,408.07 TP8_3.1
NIMU_CS: R28.1 U1.22 U5.22 | length 120.9
  TOP w5: U1.22 369.88,632.09 362.2,639.76 v1(362.2,653.54) 366.34,657.68 377.76,657.68 385.83,665.75 U5.22
  BOT w6: R28.1@331.69,672.24 343.5,672.24 v1(362.2,653.54)
NIMU_INT: U1.42 U5.12 | length 692.4
  TOP w5: U5.12@338.58,800.2 338.58,783.46 350.39,771.65 v1(354.33,771.65) ; v1(417.13,358.27) U1.42
  SIG w5: v1(354.33,771.65) 456.69,771.65 532.48,695.87 532.48,611.22 513.78,592.52 513.78,392.72 502.95,381.89 440.75,381.89 v1(417.13,358.27)
NLDO_INT: U1.43 U10.A1 | length 174.9
  TOP w5: v1(432.87,330.71) U1.43
  BOT w5: U10.A1 335.63,314.96 339.57,311.02 413.19,311.02 v1(432.87,330.71)
PON: U11.1
R/GB: R69.1 U1.14 | length 89.6
  TOP w5: U1.14 495.87,684.84 502.95,691.93 R69.1
RGB_EN: U1.17 U12.6 | length 138.1
  TOP w5: U1.17@448.82,618.11 v1(448.82,641.73)
  BOT w5: U12.6@375.98,702.76 375.98,674.8 385.63,665.16 425.39,665.16 v1(448.82,641.73)
RXD: U1.27 | length 389.1
  TOP w5: v1(202.76,570.87) 218.5,555.12 U1.27@311.81,555.12
  SIG w5: v2(193.11,811.81) 168.31,787.01 168.31,686.02 183.07,671.26 183.07,576.77 188.98,570.87 v1(202.76,570.87)
SCL: RTC0.8 U1.40 U10.A3 | length 157.7
  TOP w5: U1.40 385.63,356.1 v1(375.98,346.46) 375.98,314.96 RTC0.8
  BOT w5: U10.A3 333.66,354.33 341.54,346.46 v1(375.98,346.46)
SDA: RTC0.1 U1.41 U10.A2 | length 217.7
  TOP w5: RTC0.1 412.4,278.54 412.4,319.68 401.38,330.71 U1.41
  BOT w5: U10.A2 333.66,334.65 338.58,329.72 v1(401.57,329.72)
SW: R34.1 S1.1 | length 31.7
  BOT w5: R34.1 S1.1@575.79,700
SWDCLK: R1.1 U1.24 | length 360.3
  TOP w5: v2@252.76,802.17 v2(243.11,811.81) 218.5,787.2 218.5,695.87 237.2,677.17 294.29,677.17 338.39,633.07 U1.24 ; v1(319.88,622.05) U1.24@334.84,622.05
  BOT w5: R1.1 293.31,634.84 306.1,622.05 v1(319.88,622.05)
SWDIO: U1.23 | length 159.2
  TOP w5: v2(243.11,711.81) 265.94,688.98 299.21,688.98 354.13,634.06 U1.23
TRIM: R67.1 U1.15 | length 151.7
  TOP w5: U1.15@480.32,618.11 480.32,688.98 501.97,710.63 523.62,710.63 540.35,693.9 R67.1@545.28,693.9
TXD: U1.26 | length 234.9
  TOP w5: v1(231.3,580.71) 241.14,570.87 U1.26
  SIG w5: v2@192.91,711.61 v2(193.11,711.81) 193.11,683.07 200.79,675.39 200.79,597.44 217.52,580.71 v1(231.3,580.71)
VBAT: B+1.1 B+.1 C22.1 R23.2 R27.2 R34.2 U10.C3 | length 942.3
  TOP w6: v1(657.48,602.36) 665.35,594.49 R23.2
  TOP w12: v1(511.81,668.31) 599.41,668.31 640.75,626.97 640.75,618.11
  TOP w30: 621.74,650.03 cw(c300,500) v3@637.63,609.7 ; v3(625.98,602.36) v1(657.48,602.36)
  SIG w14: v1(231.3,422.24) 231.3,502.95 285.43,557.09 297.24,557.09 348.43,608.27 461.61,608.27 479.33,625.98 479.33,651.57 496.06,668.31 v1(511.81,668.31)
  BOT w5: v1(511.81,668.31) R34.2
  BOT w7.87: R27.2@226.38,363.19 245.08,363.19 253.94,354.33 U10.C3
  BOT w10: R27.2@226.38,363.19 209.65,379.92 209.65,400.59 v1(231.3,422.24)
  BOT w30: B+.1@633.59,621.42 cw(c300,500) C22.1@649.61,561.65
VDD: C52.1 U10.B3 | length 31.5
  BOT w7.87: U10.B3 C52.1
VDD_PA: B1.A2 C8.2 U1.30 | length 128.9
  TOP w5: C8.2@228.35,517.72 238.19,507.87 291.14,507.87
  TOP w8: B1.A2 216.34,505.71 C8.2@228.35,517.72 ; 291.14,507.87 U1.30
VER_EN: R22.1 R30.1 U1.4 | length 138.1
  TOP w5: U1.4 636.81,460.63 641.73,455.71 R30.1 R22.1
VIMU: C20.2 Q1.3 R28.2 U5.8 U5.13 | length 401
  TOP w5: U5.13@317.91,779.53 326.77,779.53 338.58,767.72 338.58,759.84 346.46,751.97 384.84,751.97 401.57,768.7 U5.8@401.57,800.2
  TOP w6: C20.2@287.4,743.11 v1(287.4,757.87) 310.04,780.51 U5.13
  TOP w10: v1@245.79,659.45 Q1.3
  SIG w12: v1@241.14,659.06 261.42,659.06 287.4,685.04 v1(287.4,757.87)
  BOT w6: v1(245.08,659.45) 257.87,672.24 R28.2@294.29,672.24
VLED: C60.2 L1.1 Q1.6 U12.1 | length 453.6
  TOP w10: Q1.6 v1@218.78,608.27
  SIG w12: v1@220.47,608.66 220.47,621.06 232.28,632.87 261.81,632.87 311.02,682.09 311.02,773.62 302.17,782.48 v1(287.4,782.48)
  BOT w8: C60.2@361.22,818.9 U12.1@376.97,783.46
  BOT w12: v1(287.4,782.48) 333.66,782.48 C60.2@363.68,812.5 ; L1.1@306.1,818.9 C60.2@361.22,818.9
  other v1: 219.49,608.27
VMCU: C1.2 C2.2 C6.2 C7.2 C17.2 C18.2 C21.2 Q1.1 Q1.4 R29.2 R42.2 R44.2 RTC0.5 U1.1 U1.12 U1.29 U1.35 U1.36 U11.5 | length 2521
  TOP w5: v1(283.27,523.62) U1.29 ; U1.12 559.05,586.61 566.73,594.29 v1@566.73,607.28 ; C1.2@593.31,606.24 593.31,593.25 615.16,576.77 637.8,576.77 641.73,572.83 R29.2
  TOP w6: U1.36 291.14,413.39 v1(283.27,421.26) 291.14,429.13 U1.35 ; U1.1 v1(566.93,413.39)
  TOP w7.87: C6.2@266.54,421.26 v1(283.27,421.26)
  TOP w8: RTC0.5 514.76,296.26 521.65,289.37 ; v1(519.68,235.24) 519.68,289.37 C21.2 ; v1@566.73,607.28 C1.2@582.68,607.28
  TOP w10: Q1.4 v1@218.78,659.45 ; v1@204.72,251.97 204.72,229.33 245.08,229.33 U11.5@252.95,237.2 ; v1(219.49,659.45) 219.49,647.64 245.79,621.34 245.79,608.27 Q1.1 ; 230.32,229.33 v1(230.32,250.98) ; U11.5@254.41,248.03 v1(279.53,248.03) ; v1(566.93,413.39) C2.2@590.55,413.39
  SIG w5: v2(193.11,761.81) 217.91,737.01 v1@217.91,659.45
  SIG w12: v1(519.68,235.24) 483.27,271.65 399.61,271.65 358.27,230.32 297.24,230.32 v1(279.53,248.03) 279.53,291.34 300.2,312.01 362.2,312.01 372.05,302.17 499.02,302.17 538.39,341.54 538.39,385.04 ; 530.51,449.61 530.51,575 v1@566.73,611.22 ; 530.71,449.61 v1(566.93,413.39) 538.58,385.04
  SIG w14: v1@204.72,251.97 204.72,508.86 ; 204.72,510.83 255.91,562.01 255.91,597.44 v1(245.08,608.27) ; v1(230.32,250.98) 230.32,308.07 283.27,361.02 v1(283.27,421.26) 301.18,421.26 311.02,431.1 311.02,473.43 283.27,501.18 v1(283.27,523.62)
  BOT w6: R44.2 219.49,636.81 v1(219.49,659.45) ; v1(245.08,608.27) 245.08,630.91 R42.2
  BOT w8: C7.2 v1@283.46,523.62
  BOT w10: C18.2@230.32,212.6 v1(230.32,250.98)
  other v1: 204.72,250.98 566.73,608.27
VRGB: C61.2 D3.4 D4.4 R14.2 R16.2 R20.2 R25.2 R60.2 TP4_1_1.1 TP8_2.1 U12.4 | length 1274.3
  TOP w5: v1(586.61,331.69) R20.2@586.61,353.35 ; v1(593.5,570.87) 606.3,558.07 R25.2
  TOP w6: v1(468.5,708.66) R60.2@468.5,729.33
  SIG w5: 547.24,468.5 547.24,547.24 555.12,555.12 577.76,555.12 v1(593.5,570.87) ; 547.44,468.5 555.32,460.63 577.95,460.63 v1(593.7,444.88)
  SIG w12: v1(276.57,587.6) 276.57,619.09 335.63,678.15 365.16,678.15 395.67,708.66 v1(468.5,708.66)
  BOT w5: R14.2 310.04,506.89 319.88,516.73 D3.4@339.57,516.73 ; TP4_1_1.1 535.43,610.24 558.07,587.6 576.77,587.6 v1(593.5,570.87) ; v1(586.61,331.69) 586.61,371.06 593.7,378.15 v1(593.7,444.88)
  BOT w6: v1(468.5,708.66) 472.44,704.72 472.44,682.09 R16.2@475.39,679.13
  BOT w8: C61.2 C61.2@468.5,733.27 ; C61.2@480.32,729.33 492.13,717.52 492.13,628.94 TP4_1_1.1@506.69,614.37 ; TP8_2.1 487.2,590.75 TP4_1_1.1
  BOT w10: D4.4@209.15,539.86 211.12,539.86 231.3,560.04 314.96,560.04 344.38,530.62 D3.4 ; 276.57,561.02 v1(276.57,587.6) ; U12.4@427.17,702.76 427.17,724.41 433.07,730.32 C61.2@465.55,730.32 ; C61.2@465.55,729.33 C61.2@480.32,729.33
  BOT w12: v1(468.5,708.66) C61.2
VSYS: C24.2 R27.1 U10.C2 U11.4 | length 333.1
  TOP w10: U11.4@305.12,248.03 319.88,248.03 333.66,234.25 C24.2 v1(357.28,262.8)
  BOT w7.87: R27.1 245.08,324.8 254.92,334.65 U10.C2
  BOT w10: R27.1 214.57,312.01 214.57,296.26 223.43,287.4 270.67,287.4 295.28,262.8 v1(357.28,262.8)
XC1: C4.2 U1.37 X1.1 | length 148.5
  TOP w5: X1.1 X1.1@226.42,349.41
  TOP w6: X1.1@226.42,349.41 247.09,370.08 263.78,370.08 C4.2@275.59,381.89 ; C4.2 293.31,391.73 318.9,366.14 334.45,366.14 338.39,370.08 U1.37
XC2: C5.2 U1.38 X1.3 | length 136.9
  TOP w6: X1.3 267.76,299.25 301.22,332.72 C5.2@301.22,333.66 ; C5.2@305.16,333.66 307.09,333.66 307.09,346.46 314.96,354.33 342.32,354.33 354.13,366.14 U1.38
pads on no net: D4.1 D4.2 D4.3 RTC0.4 RTC0.7 U5.1 U5.2 U5.3 U5.4 U5.5 U5.6 U5.14 U5.15 U5.16 U5.17 U5.19 U11.3 X1.2 X1.4

## Polygon pours and split planes (outlines as drawn)
GND on VSS (split plane): -45.1,633.37 -45.79,634.21 -48.83,636.71 -52.31,638.57 -56.08,639.71 -58.57,639.96 -55.7,647.34 -48.93,662.71 -45.1,670.49
GND on VSS (split plane): 153 vertices, not listed, extent 100,114.99 684.99,885.01
GND on VSS (split plane): -80.1,439.25 -81.71,449.75 -83.54,466.44 -84.64,483.21 -85.01,500 -84.64,516.79 -83.54,533.56 -81.71,550.25 -80.1,560.75
GND on VSS (split plane): -45.1,329.51 -48.93,337.29 -55.7,352.66 -58.57,360.04 -56.08,360.29 -52.31,361.43 -48.83,363.29 -45.79,365.79 -45.1,366.63

## Other copper
TOP:
  text "1" at 1000,330 h60 r90
SIG:
  text "2" at 1000,405 h60 r90
BOT:
  text "4" at 1000,605 h60 r90
VSS (plane layer: these items are gaps in the copper):
  region: 1030,305 1030,480 900,480 900,305
  region: 1025,573.7 1025,680 895,680 895,573.7
  lines w40: -60,380 -60,620 ; -25,275 -25,730 ; 10,230 10,770 ; 45,195 45,805 ; 78.9,580 78.9,829.58 ; 80,169.62 80,425 ; 111.36,151.77 111.36,322.15 cw(c600,500) 111.36,677.85 111.36,848.23
  text "3" at 1000,505 h60 r90
Multi-Layer:
  lines w6: 2125,1950 2350,1950 ; 2125,2500 2350,2500 ; 1075,2000 2125,2000 2125,2050 1075,2050 1075,2000 ; 1075,2150 2125,2150 2125,2300 1075,2300 1075,2150 ; 1075,2400 1075,2450 2125,2450 2125,2400 1075,2400

## Silkscreen, mask and mechanical layers (free items; w line width, h text height)
Mechanical 1:
  lines w10: -141.96,708.61 ccw(c500,500) -141.86,291.1 ; 104.53,848.99 ccw(c300,500) 105.32,150.57 ; 105,150 cw(c125,150) 145,150 145,130 ; 105,850 ccw(c125,850) 145,850 145,870 ; 145.44,131.07 ccw(c300,500) 145.44,868.93 ; 500,153.59 cw(c558.65,60.56) 668.62,60.01 668.62,0 ; 500,846.41 ccw(c558.65,939.44) 668.62,939.99 668.62,1000 ; 652.85,307.5 ccw(c492.16,499.02) 652.85,690.53
Mechanical 13:
  circle w10: c300,500 r400
  circle w10: c400,500 r400
  circle w10: c350,500 r500
  circle w10: c517.13,503.94 r25
Mechanical 15:
  circle w10: c573,300 r10
  circle w10: c573,700 r10
  lines w10: 93.11,303.15 -25,303.15 -25,381.89 93.11,381.89 93.11,460.63 -25,460.63 -25,539.37 93.11,539.37 93.11,618.11 -25,618.11 -25,696.85 93.11,696.85 ; 300,450 300,550 ; 543,300 543,700 ; 573,250 573,750 ; 603,300 603,700
Drill Drawing:
  lines w5: 7140,-710 7140,1790 12890,1790 ; 7156,-710 12890,-710 ; 8015.23,4347.28 10215.23,4347.28 ; 9340,-710 9340,-460 ; 9340,1790 9340,965 ; 10665,15 10665,440 ; 11440,-696 11440,-464 11440,15 11440,440 ; 12879,961 9340,965 ; 12890,-700 12890,1797 ; 12890,-460 9340,-460 ; 12890,15 9340,15 ; 12890,440 9340,440 ; 9340,-460 9340,15 ; 9340,15 9340,440 ; 9340,440 9340,965
  lines w8: 7156,-710 -1435,-710 -1435,8650 12890,8650 12890,1785
  lines w20: 1125,1950 2075,1950 ; 1125,2100 2075,2100 ; 1125,2350 2075,2350 ; 1125,2500 2075,2500
  text "FABRICATION NOTES" at 7486,8095 h120
  text "4 LAYER BOARD" at 7481,7866 h120
  text "1. Material to be CEM3, FR4, or MC3 @" at 7502,7626 h85
  text ".031\" +/- .005\" nominal thickness." at 9900,7626 h85
  text "2. Finished copper thickness to" at 7494,7484 h85
  text "be 1 oz." at 9370,7484 h85
  text "requirements for" at 10913,7362 h85
  text "nent side to meet IPC600" at 9325,7355 h85
  text "3. All holes drilled from compo" at 7494,7348 h85
  text "breakout.  Hole size indicates finished diameter" at 7660,7225 h85
  text "4. All tooling hole centers to be within +/- .003\" of center of datum hole" at 7494,7074 h85
  text "All other hole centers to be within +/- .005\" of center datum hole" at 7668,6937 h85
  text "5. Trace width reduction due to etch factor, pits or dents is not to exceed .005\"" at 7494,6792 h85
  text "6. Minimum annular ring to meet" at 7501,6633 h85
  text "IPC600 requirements." at 9492,6626 h85
  text "7. Apply silkscreen using white" at 7501,6460 h85
  text "epoxy ink to component side," at 9347,6460 h85
  text "per artwork provided." at 11163,6460 h85
  text "8. Apply soldermask over bare copper per artwork provided." at 7501,6301 h85
  text "PC401 or SR1000 Green." at 7665,6160 h85
  text "9. Boards must display manufacturers UL company ID (or Trademark) and type" at 7510,6030 h85
  text "designator in copper or white epoxy ink." at 7660,5900 h85
  text "+/-" at 7481.35,4693.22 h85
  text ".XX" at 9323.92,2996.81 h85
  text "ANGLES" at 10313.92,2996.81 h85
  text ".XXX" at 9743.92,2988.81 h85
  text ".LEGEND" at 7625,2950 h100
  text ".005" at 9743.92,2828.81 h85
  text ".01" at 9331.92,2823.81 h85
  text "dimensions are in inches" at 10864.16,2781.72 h85
  text "Tolerances are:" at 10864.16,2631.72 h85
  text "TOP Layer" at 450,2475 h60
  text "PrePreg" at 1475,2410 h30
  text "GND Layer" at 450,2350 h60
  text "0.014 Core" at 1450,2200 h30
  text "0.031 +- 0.005 mils" at 2225,2200 h100
  text "SIG Layer" at 450,2100 h60
  text "PrePreg" at 1480,2010 h30
  text "BOT Layer" at 450,1900 h60
  text "Unless otherwise specified" at 7276,1606 h85
  text "SayHello" at 10725,1600 h120
  text "1660 17th St" at 10525,1400 h120
  text "San Fransciso, CA 94105" at 10253,1239 h120
  text "Top Side Compenent Designators" at -145,1135 h30
  text "(415) 000-0000" at 10441,1044 h120
  text "TITLE:" at 9385,826 h85
  text "FABRICATION DRAWING" at 10305,765 h100
  text "Pill PCB Fab Drawing" at 9793,560 h120
  text "B: Add Voltage level shifting" at 7205,531 h90
  text "D:make pin 8 of J2 go to chassis" at 7205,345 h90
  text "DWG NO.:" at 9392,316 h85
  text "REV:" at 10743,316 h85
  text "ECO NO.:" at 11515,316 h85
  text "A" at 11108,140 h120
  text "000-00000" at 9450,130 h120
  text "DRAWN BY:" at 9422,-134 h85
  text "DATE:" at 11530,-134 h85
  text "Dyke Shaffer" at 10234,-289 h120
  text "05.16.14" at 11828,-311 h120
  text "SCALE:" at 9385,-584 h85
  text "SHEET" at 11523,-629 h85
  text "OF" at 12258,-636 h85
  text "1" at 12036,-638 h120
  text "1" at 12519,-638 h120
  text "N/A" at 9869,-648 h120